# Altium PCB MTR_DVR_PCB.PcbDoc
Units mm, origin at the board's own origin, x right, y up, seen from the top; angles counter-clockwise.
Board outline 54.23 x 29.34 mm, 2 copper layers (Top Layer, Bottom Layer); 25 components, 19 nets, 71 pads, 26 vias.
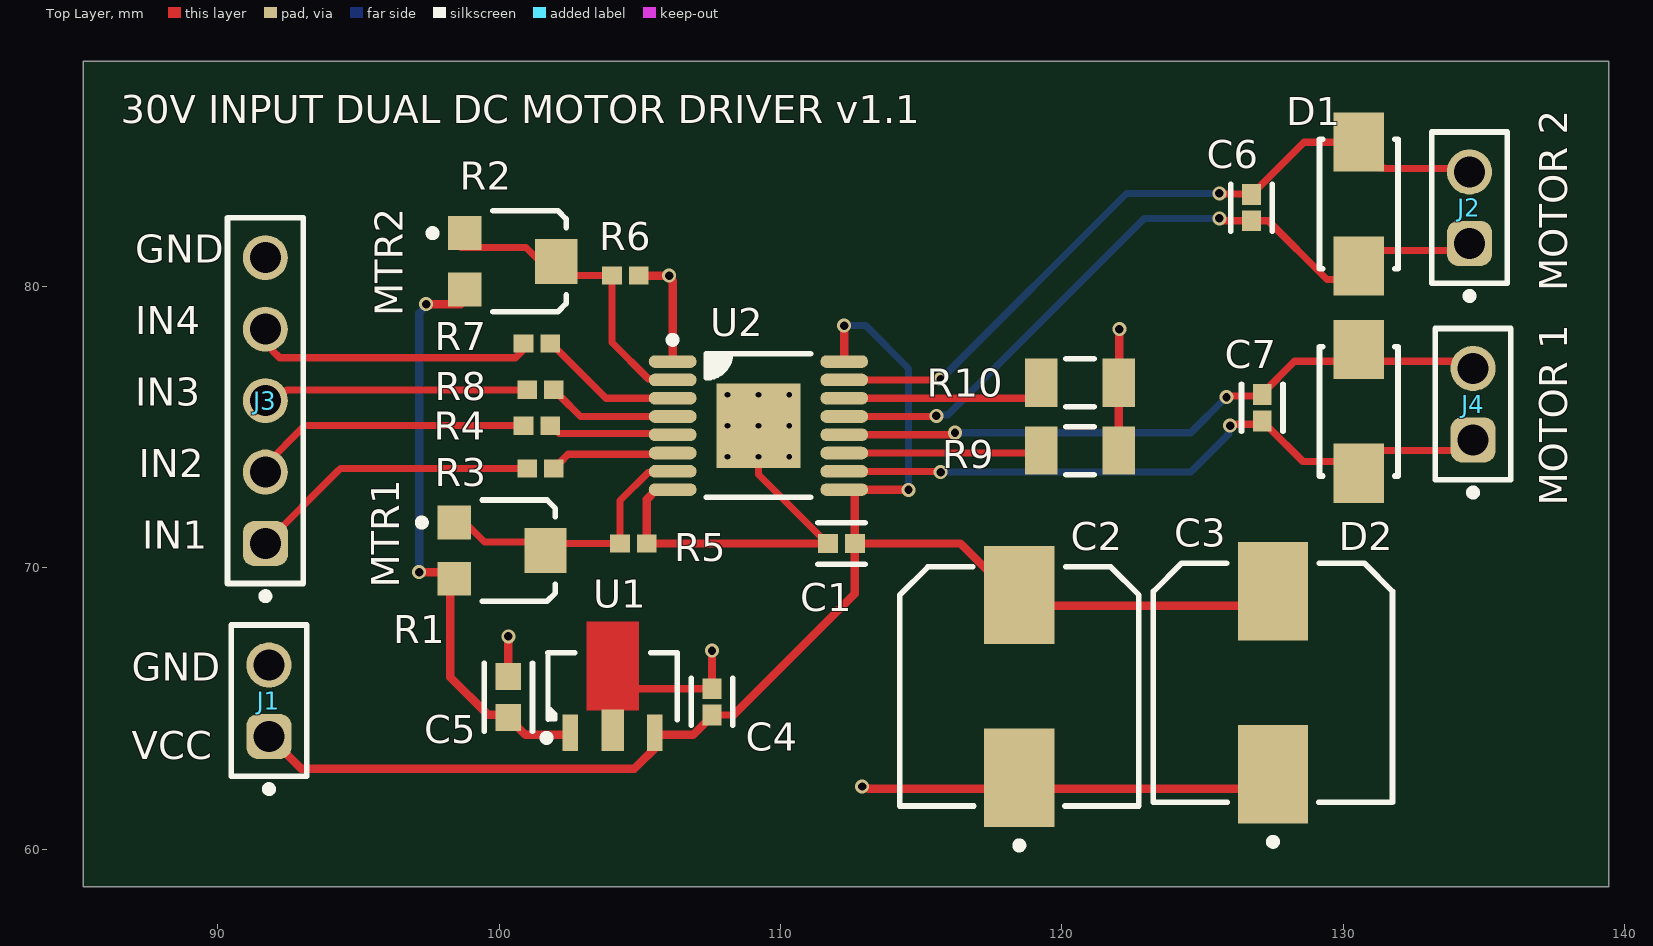
[diagram p0: Top Layer view]
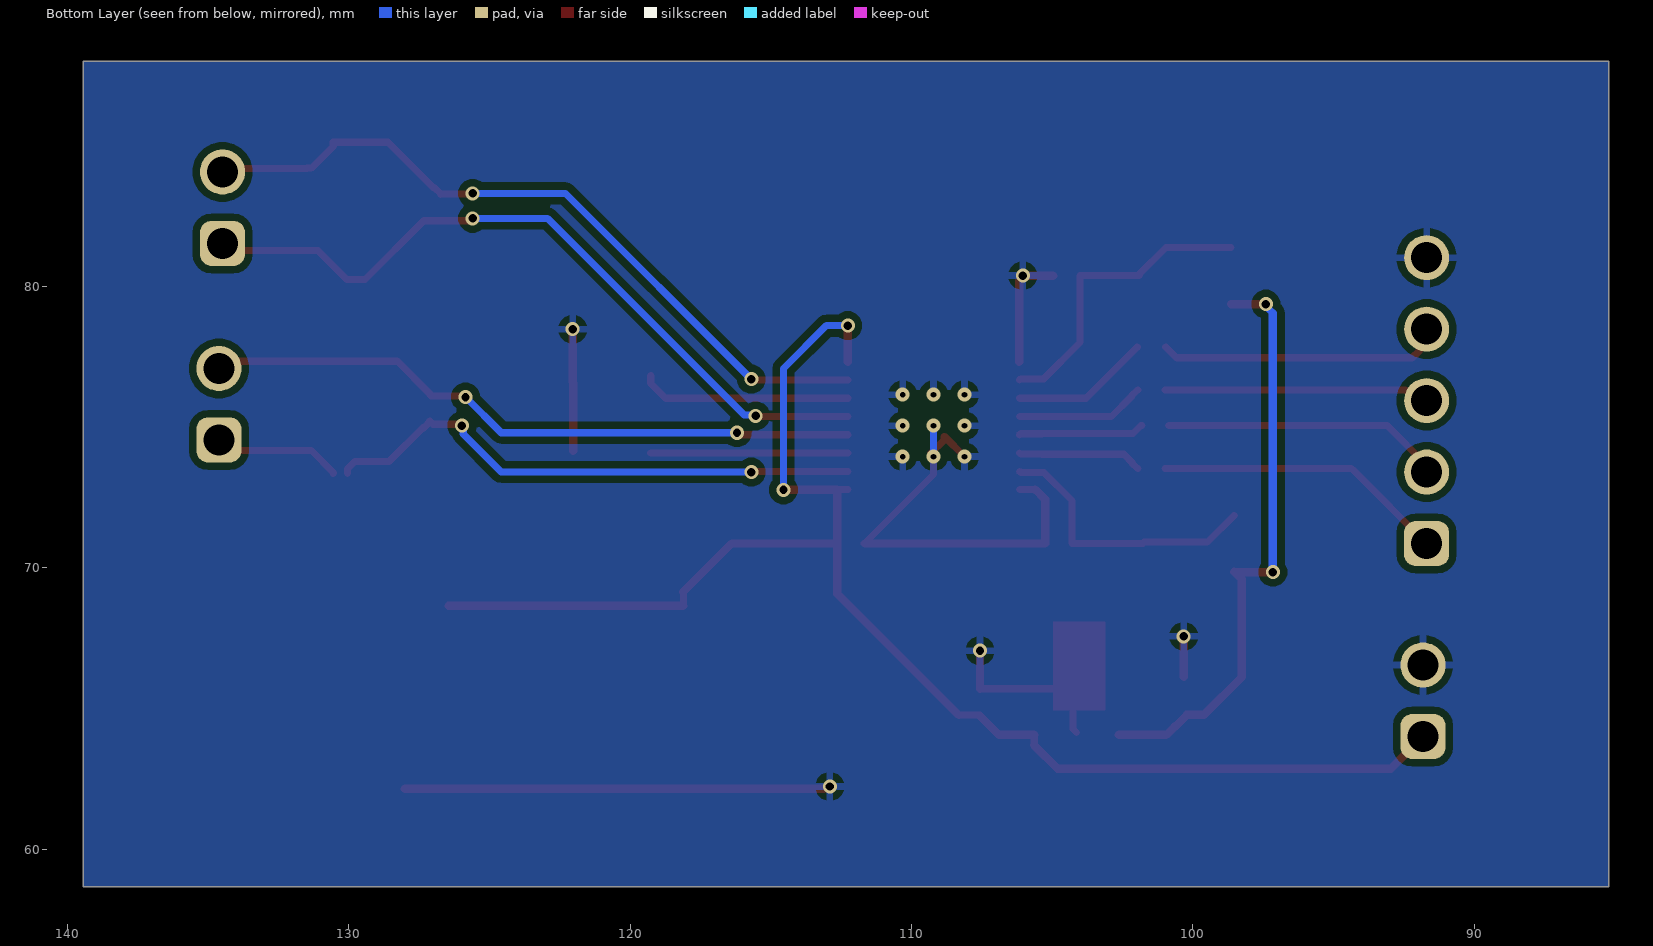
[diagram p1: Bottom Layer view, seen from below]
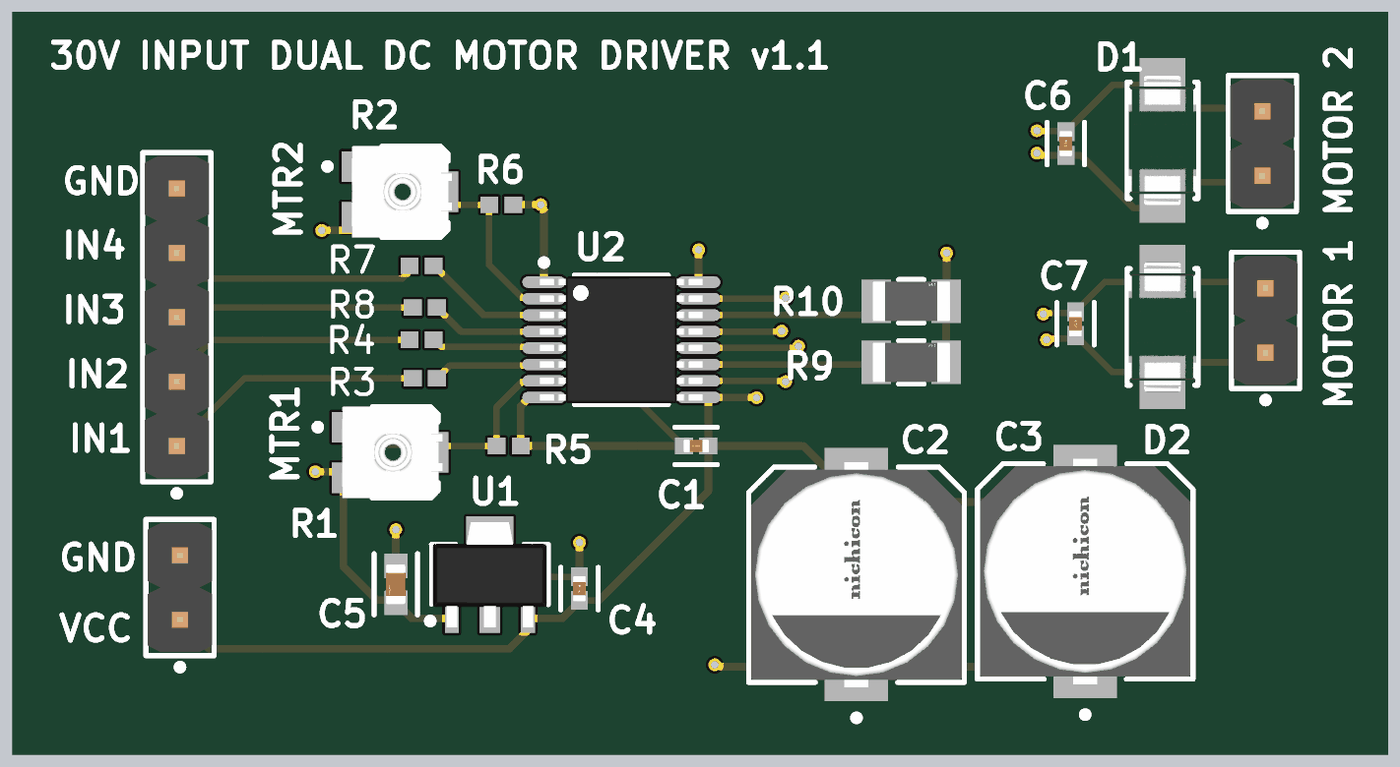
[diagram p2: 3D render of the assembled board from above, using the file's embedded part models]

## Layer stack, top to bottom
Top Solder: solder mask 0.0102, Solder Resist, Dk 3.5
Top Layer: signal copper 0.0356
Dielectric 1: dielectric 0.32, FR-4, Dk 4.8
Bottom Layer: signal copper 0.0356
Bottom Solder: solder mask 0.0102, Solder Resist, Dk 3.5

## Board outline
85.217,58.674 139.446,58.674 139.446,88.011 85.217,88.011

## Design rules (kind name [scope] priority, off if disabled: settings)
Clearance [All] p1: gap=0.1 ignorepadtopadclearanceinfootprint=TRUE
MinimumSolderMaskSliver [All] p1: minsoldermaskwidth=0.1
PolygonConnect [All] p1: connectstyle=Relief reliefconductorwidth=0.254 reliefentries=4 polygonreliefangle="90 Angle" airgapwidth=0.254
RoutingVias [All] p1: holewidth=0.711 width=1.27 viastyle="Through Hole" minholewidth=0.711 minwidth=1.27 maxholewidth=0.711 maxwidth=1.27
SilkToSilkClearance [All] p1: silktosilkclearance=0.15
SilkToSolderMaskClearance [IsPad] p1: minsilkscreentomaskgap=0.15 clearancetoexposedcopper=TRUE
SolderMaskExpansion [All] p1: expansion=0.102 istentingtop=FALSE
Width [All] p1: maxlimit=0.35 minlimit=0.254 preferedwidth=0.254
27 further rules are at their usual default settings.

## Components (designator, comment, footprint, x,y, rotation, side; value= is the part's Value field where it differs from the comment)
C1 "220nF, 50V" FP-0402-L_1_0_0_05-W_0_5-IPC_A 112.17,70.866 r0 top value=220nF
C2 "100uF, 50V" 100U_50V_ELECTROLYTIC_CAP 118.491,65.786 r90 top
C3 "100uF, 50V" 100U_50V_ELECTROLYTIC_CAP 127.508,65.913 r90 top
C4 "1uF" 1U_0402_CER_CAP_35V 107.569,65.237 r270 top
C5 "2u2" 2_2U_0402_CER_CAP 100.33,65.405 r270 top
C6 "0.1u" 1U_0402_CER_CAP_35V 126.746,82.804 r270 top
C7 "0.1u" 1U_0402_CER_CAP_35V 127.127,75.692 r270 top
D1 "SMAJ36CA" TVS_DIODE 130.556,82.931 r270 top
D2 "SMAJ36CA" TVS_DIODE 130.556,75.565 r270 top
J1 "61300211121" 2_POS_HEADER_2_54 91.821,65.278 r90 top
J2 "61300211121" 2_POS_HEADER_2_54 134.493,82.804 r90 top
J3 "61300511121" 5_POS_HEADER_2_54 91.694,75.946 r90 top
J4 "61300211121" 2_POS_HEADER_2_54 134.62,75.819 r90 top
R1 "10k" 10K_TRIM_POT 100.203,70.612 r0 top value=10kR
R2 "10k" 10K_TRIM_POT 100.584,80.899 r0 top value=10kR
R3 "33R" 33_0402_RES 101.473,73.533 r0 top
R4 "33R" 33_0402_RES 101.346,75.057 r0 top
R5 "750R" 750_0402_RES 104.775,70.866 r180 top
R6 "750R" 750_0402_RES 104.488,80.391 r180 top
R7 "33R" 33_0402_RES 101.346,77.978 r0 top
R8 "33R" 33_0402_RES 101.473,76.327 r0 top
R9 "0.25R" 0_25_RESISTOR 120.65,74.168 r0 top
R10 "0.25R" 0_25_RESISTOR 120.65,76.581 r0 top
U1 "AP7381-33SA-7" "DIODES INC SOT-89 LINEAR REG" 104.037,64.585 r90 top
U2 "A4954ELPTR-T" "ALLEGRO TSSOP-16EP LP" 109.22,75.057 r0 top

## Footprints (in the part's own frame and the unit in brackets; to place one, negate y for a bottom-side part, rotate by r counter-clockwise, add the part's x,y. Pads: shape width x height; smd on the part's side, far side on the other; paste and mask are expansions set on the pad)
0_25_RESISTOR [mil]
  rect 45.5x67.25 smd paste+0 mask+0: 1(-54.18,0) 2(54.18,0)
  silkscreen extent -20,-34 20,34, body extent -87,-43 87,43, height 10
1U_0402_CER_CAP_35V [mm]
  rect 0.739x0.672 smd paste+0 mask+0: 1(-0.467,0) 2(0.467,0)
  silkscreen extent -0.84,-0.74 0.84,0.74, body extent -1.04,-0.54 1.04,0.54, height 0.25
2_2U_0402_CER_CAP [mm]
  rect 0.959x0.912 smd paste+0 mask+0: 1(-0.727,0) 2(0.727,0)
  silkscreen extent -1.21,-0.86 1.21,0.86, body extent -1.46,-0.71 1.46,0.71, height 0.25
2_POS_HEADER_2_54 [mm] "Pin Header, pitch 2.54 mm, THT, Vertical, single row, 2p"
  rrect50% 1.6x1.6 hole 1.1: 1(-1.27,0)
  round 1.6 hole 1.1: 2(1.27,0)
  silkscreen extent -3.26,-1.35 2.69,1.35, body extent -2.54,-1.27 2.54,1.27, height 8.57
5_POS_HEADER_2_54 [mm] "Pin Header, pitch 2.54 mm, THT, Vertical, single row, 5p"
  rrect50% 1.6x1.6 hole 1.1: 1(-5.08,0)
  round 1.6 hole 1.1: 2(-2.54,0) 3(0,0) 4(2.54,0) 5(5.08,0)
  silkscreen extent -7.07,-1.35 6.5,1.35, body extent -6.35,-1.27 6.35,1.27, height 8.57
10K_TRIM_POT [mm] "SMD, 3-Leads, Body 3.8x3.6mm"
  rect 1.2x1.2 smd: 1(-1.8,1) 3(-1.8,-1)
  rect 1.5x1.6 smd: 2(1.45,0)
  silkscreen extent -3.07,-1.8 1.8,1.8, body extent -2,-1.8 1.96,1.8, height 1.15
33_0402_RES [mm] "Chip Resistor, 2-Leads, Body 1.00x0.50mm, IPC Low Density"
  rect 0.7x0.65 smd: 1(-0.475,0) 2(0.475,0)
  body extent -0.53,-0.27 0.53,0.28, height 0.4
100U_50V_ELECTROLYTIC_CAP [mm]
  rect 3.5x2.5 smd paste+0 mask+0: 1(-3.25,0) 2(3.25,0)
  silkscreen extent -5.77,-4.25 4.25,4.25, body extent -5.25,-4.5 5.25,4.5, height 0.25
750_0402_RES [mm] "Chip Resistor, 2-Leads, Body 1.00x0.50mm, IPC Low Density"
  rect 0.7x0.65 smd: 1(-0.475,0) 2(0.475,0)
  body extent -0.53,-0.27 0.53,0.28, height 0.4
"ALLEGRO TSSOP-16EP LP" [mm] "TSSOP, 16-Leads, Body 5.00x4.40mm, Pitch 0.65mm, Thermal Pad 3.00x3.00mm, IPC Medium Density"
  oval 1.7x0.45 smd: 1(-3.05,2.275) 2(-3.05,1.625) 3(-3.05,0.975) 4(-3.05,0.325) 5(-3.05,-0.325) 6(-3.05,-0.975) 7(-3.05,-1.625) 8(-3.05,-2.275) 9(3.05,-2.275) 10(3.05,-1.625) 11(3.05,-0.975) 12(3.05,-0.325) 13(3.05,0.325) 14(3.05,0.975) 15(3.05,1.625) 16(3.05,2.275)
  rect 3x3 smd: 17(0,0)
  silkscreen extent -3.17,-2.55 1.85,3.17, body extent -3.21,-2.5 3.21,2.5, height 1.2
"DIODES INC SOT-89 LINEAR REG" [mm] "SOT89, 3-Leads, Body 4.50x2.50mm, Pitch 1.50mm, Lead Span 3.3mm, IPC Medium Density"
  rect 1.3x0.55 smd: 1(-0.45,1.5) 3(-0.45,-1.5)
  rect 1.475x0.8 smd: 2(-0.362,0)
  Top Layer region: 0.35,0.925 3.5,0.925 3.5,-0.925 0.35,-0.925
  silkscreen extent -0.75,-2.3 2.4,2.47, body extent -0.87,-2.25 3.28,2.25, height 1.5
FP-0402-L_1_0_0_05-W_0_5-IPC_A [mm]
  rect 0.715x0.672 smd paste+0 mask+0: 1(-0.479,0) 2(0.479,0)
  silkscreen extent -0.84,-0.74 0.84,0.74, body extent -1.04,-0.54 1.04,0.54, height 0.25
TVS_DIODE [mm]
  rect 2.1x1.8 smd paste+0 mask+0: 1(-2.2,0) 2(2.2,0)
  silkscreen extent -2.3,-1.4 2.3,1.4, body extent -3.35,-1.5 3.35,1.5, height 0.25

## Part data
C1: library part UMK105BJ224KV-F, "CAP CER 0.22UF 50V X5R 0402", Case Code (Imperial)=0402, Case Code (Metric)=1005, Dielectric=X5R, LCSC Part No.=C268018, Manufacturer="Taiyo Yuden", Max Operating Temperature=85°C, Min Operating Temperature=-55°C, Package Quantity=1, Tolerance=10%, Voltage Rating=50V, Case/Package=0402, Category="Ceramic Capacitors", ComponentLink1Description=https://datasheet.ciiva.com/24495/460umk105bj224kv-f-24495779.pdf?src-supplier=Onlinecomponents.com, ComponentLink1URL=https://datasheet.ciiva.com/24495/460umk105bj224kv-f-24495779.pdf?src-supplier=Onlinecomponents.com, ComponentLink2Description=https://datasheet.ciiva.com/30112/713umk105bj224kv-f-30112478.pdf?src-supplier=Onlinecomponents.com, ComponentLink2URL=https://datasheet.ciiva.com/30112/713umk105bj224kv-f-30112478.pdf?src-supplier=Onlinecomponents.com, ComponentLink3Description=https://datasheet.ciiva.com/18697/mlcc-all-e-18697509.pdf?src-supplier=Digikey, ComponentLink3URL=https://datasheet.ciiva.com/18697/mlcc-all-e-18697509.pdf?src-supplier=Digikey, Halogen Free=5694HalogenFree, Height=0.5mm, Lead Free=5697LeadFree, Length=0.039inch, Manufacturer Part Number=UMK105BJ224KV-F, Material=4241ConductorMaterial, Mounting Technology="Surface Mount", Packaging="Tape and Reel", Pricing="10000=0.03115, 20000=0.03045, 40000=0.02905, 60000=0.02398, 80000=0.02338 (USD)", RoHS=Yes, RoHS Compliant=Yes, Series=M, Stock=170000, Supplier=Avnet, Supplier Part Number=UMK105BJ224KV-F, Termination=SMD/SMT, Thickness=0.022inch, Voltage Rating (DC)=50V, Width=0.02inch
C2 C3: library part UWT1H101MNL1GS, "CAP ALUM 100UF 20% 50V SMD", Dielectric Material=158ConductorMaterial, LCSC Part No.=C445063, Manufacturer=Nichicon, Supplier Part Number=7392870P, Category="Aluminum Electrolytic Capacitors", ComponentLink1Description=https://datasheet.ciiva.com/11776/0900766b80fa3a91-11776930.pdf?src-supplier=Rs, ComponentLink1URL=https://datasheet.ciiva.com/11776/0900766b80fa3a91-11776930.pdf?src-supplier=Rs, ComponentLink2Description=https://datasheet.ciiva.com/97/e-wt-97104.pdf?src-supplier=Digikey, ComponentLink2URL=https://datasheet.ciiva.com/97/e-wt-97104.pdf?src-supplier=Digikey, ComponentLink3Description=https://datasheet.ciiva.com/97/e-wt-97105.pdf?src-supplier=Digikey, ComponentLink3URL=https://datasheet.ciiva.com/97/e-wt-97105.pdf?src-supplier=Digikey, ComponentLink4Description=https://datasheet.ciiva.com/97/e-wt-97106.pdf?src-supplier=Digikey, ComponentLink4URL=https://datasheet.ciiva.com/97/e-wt-97106.pdf?src-supplier=Digikey, ComponentLink5Description=https://datasheet.ciiva.com/5362/e-wt-30307-5362773.pdf?src-supplier=Mouser, ComponentLink5URL=https://datasheet.ciiva.com/5362/e-wt-30307-5362773.pdf?src-supplier=Mouser, ComponentLink6Description=https://datasheet.ciiva.com/28458/1910938-28458459.pdf?src-supplier=Element14, ComponentLink6URL=https://datasheet.ciiva.com/28458/1910938-28458459.pdf?src-supplier=Element14, ComponentLink7Description=https://datasheet.ciiva.com/7781/e-wt-7781807.pdf?src-supplier=Element14, ComponentLink7URL=https://datasheet.ciiva.com/7781/e-wt-7781807.pdf?src-supplier=Element14, ComponentLink8Description=https://datasheet.ciiva.com/11686/e-wt-11686889.pdf?src-supplier=Avnet, ComponentLink8URL=https://datasheet.ciiva.com/11686/e-wt-11686889.pdf?src-supplier=Avnet, ComponentLink9Description=https://datasheet.ciiva.com/16502/e-wt-16502940.pdf?src-supplier=Future+Electronics, ComponentLink9URL=https://datasheet.ciiva.com/16502/e-wt-16502940.pdf?src-supplier=Future+Electronics, Lead Free=5697LeadFree, Manufacturer Part Number=UWT1H101MNL1GS, Polarity=5066Direction, Pricing="250=0.114, 1000=0.111 (GBP)", RoHS=Yes, Stock=280, Supplier=Rs
C4: library part C1005X5R1V105K050BC, "1 µF ±10% 35V Ceramic Capacitor X5R 0402 (1005 Metric)", Case Code (Imperial)=0402, Case Code (Metric)=1005, Dielectric=X5R, Dielectric Material=Ceramic, LCSC Part No.=C5331012, Manufacturer=TDK, Max Operating Temperature=85°C, Min Operating Temperature=-55°C, Supplier Part Number=445-9073-1-ND, Tolerance=10%, Voltage Rating=35V, Case/Package=0402, Category="Ceramic Capacitors", ComponentLink1Description=https://datasheet.ciiva.com/26834/getdatasheetpartid-750449-26834298.pdf?src-supplier=Verical, ComponentLink1URL=https://datasheet.ciiva.com/26834/getdatasheetpartid-750449-26834298.pdf?src-supplier=Verical, ComponentLink2Description=https://datasheet.ciiva.com/28451/1796654-28451087.pdf?src-supplier=Element14, ComponentLink2URL=https://datasheet.ciiva.com/28451/1796654-28451087.pdf?src-supplier=Element14, ComponentLink3Description=https://datasheet.ciiva.com/22719/1796654-22719533.pdf?src-supplier=Element14, ComponentLink3URL=https://datasheet.ciiva.com/22719/1796654-22719533.pdf?src-supplier=Element14, Depth=0.5mm, Lead Free="Lead Free", Length=1mm, Manufacturer Part Number=C1005X5R1V105K050BC, Material=4241ConductorMaterial, Mounting Technology="Surface Mount", Packaging="Tape and Reel", Pricing="1=0.18, 10=0.122, 50=0.0728, 100=0.0573, 500=0.04234, 1000=0.03506, 2500=0.03263, 5000=0.02985 (USD)", Radiation Hardening=No, Reach SVHC Compliant=No, RoHS=Yes, RoHS Compliant=Yes, Series=C, Stock=841637, Supplier=Digikey
C5: library part GRM188R6YA225KA12D, "CAP CER 2.2UF 35V X5R 0603", LCSC Part No.=C86017, Manufacturer=Murata, Supplier Part Number=490-7204-1-ND, Category="Ceramic Capacitors", ComponentLink1Description=https://datasheet.ciiva.com/14906/partnumbering-e-01-14906490.pdf?src-supplier=Digikey, ComponentLink1URL=https://datasheet.ciiva.com/14906/partnumbering-e-01-14906490.pdf?src-supplier=Digikey, ComponentLink2Description=https://datasheet.ciiva.com/14906/partnumbering-e-01-14906491.pdf?src-supplier=Digikey, ComponentLink2URL=https://datasheet.ciiva.com/14906/partnumbering-e-01-14906491.pdf?src-supplier=Digikey, ComponentLink3Description=https://datasheet.ciiva.com/14906/partnumbering-e-01-14906492.pdf?src-supplier=Digikey, ComponentLink3URL=https://datasheet.ciiva.com/14906/partnumbering-e-01-14906492.pdf?src-supplier=Digikey, Lead Free=5697LeadFree, Manufacturer Part Number=GRM188R6YA225KA12D, Pricing="1=0.19, 10=0.131, 50=0.0786, 100=0.0618, 500=0.04562, 1000=0.03776 (USD)", RoHS=Yes, Stock=373912, Supplier=Digikey
C6 C7: library part GMK105BJ104KV-F, "CAP CER 0.1UF 35V X5R 0402", LCSC Part No.=C187828, Manufacturer="Taiyo Yuden", Supplier Part Number=587-1994-6-ND, Category="Ceramic Capacitors", ComponentLink1Description=https://datasheet.ciiva.com/30194/200gmk105bj104kv-f-30194761.pdf?src-supplier=Onlinecomponents.com, ComponentLink1URL=https://datasheet.ciiva.com/30194/200gmk105bj104kv-f-30194761.pdf?src-supplier=Onlinecomponents.com, ComponentLink2Description=https://datasheet.ciiva.com/11464/gmk105bj104kv-f-ss-11464131.pdf?src-supplier=Avnet, ComponentLink2URL=https://datasheet.ciiva.com/11464/gmk105bj104kv-f-ss-11464131.pdf?src-supplier=Avnet, ComponentLink3Description=https://datasheet.ciiva.com/30104/147gmk105bj104kv-f-30104963.pdf?src-supplier=Onlinecomponents.com, ComponentLink3URL=https://datasheet.ciiva.com/30104/147gmk105bj104kv-f-30104963.pdf?src-supplier=Onlinecomponents.com, ComponentLink4Description=https://datasheet.ciiva.com/15920/1013gmk105bj104kv-f-15920676.pdf?src-supplier=Onlinecomponents.com, ComponentLink4URL=https://datasheet.ciiva.com/15920/1013gmk105bj104kv-f-15920676.pdf?src-supplier=Onlinecomponents.com, ComponentLink5Description=https://datasheet.ciiva.com/5412/mlcc-all-e-541559-5412764.pdf?src-supplier=Mouser, ComponentLink5URL=https://datasheet.ciiva.com/5412/mlcc-all-e-541559-5412764.pdf?src-supplier=Mouser, ComponentLink6Description=https://datasheet.ciiva.com/7657/1497285-7657325.pdf?src-supplier=Element14, ComponentLink6URL=https://datasheet.ciiva.com/7657/1497285-7657325.pdf?src-supplier=Element14, ComponentLink7Description=https://datasheet.ciiva.com/22694/1497285-22694245.pdf?src-supplier=Element14, ComponentLink7URL=https://datasheet.ciiva.com/22694/1497285-22694245.pdf?src-supplier=Element14, Halogen Free=5694HalogenFree, Manufacturer Part Number=GMK105BJ104KV-F, Material=4241ConductorMaterial, Pricing="1=0.13, 10=0.089, 50=0.053, 100=0.0417, 500=0.0308, 1000=0.0255, 2500=0.02374, 5000=0.02172 (USD)", RoHS=Yes, Stock=1172174, Supplier=Digikey
D1 D2: "TVS DIODE 36VWM 58.1VC DO214AC", Breakdown Voltage=40V, Case/Package=DO-214AC, Clamping Voltage=58.1V, LCSC Part No.=C908830, Leakage Current=1uA, Manufacturer=Littelfuse, Max Breakdown Voltage=44.2V, Max Operating Temperature=150°C, Max Power Dissipation=3.3W, Max Surge Current=6.9A, Min Operating Temperature=-65°C, Operating Supply Voltage=36V, Package Quantity=5000, Peak Pulse Power=400W, Power Line Protection=No, Supplier Part Number=SMAJ36CALFCT-ND, Test Current=1mA, Category="TVS Diodes", Clamping Voltage-Max=58.1V, ComponentLink1Description=https://datasheet.ciiva.com/16487/littelfuse-tvs-diode-smaj-16487439.pdf?src-supplier=Future+Electronics, ComponentLink1URL=https://datasheet.ciiva.com/16487/littelfuse-tvs-diode-smaj-16487439.pdf?src-supplier=Future+Electronics, ComponentLink2Description=https://datasheet.ciiva.com/331/littelfuse-tvs-diode-smaj-datasheet-pdf-331061.pdf?src-supplier=Digikey, ComponentLink2URL=https://datasheet.ciiva.com/331/littelfuse-tvs-diode-smaj-datasheet-pdf-331061.pdf?src-supplier=Digikey, ComponentLink3Description=https://datasheet.ciiva.com/331/littelfuse-tvs-diode-smaj-datasheet-pdf-331062.pdf?src-supplier=Digikey, ComponentLink3URL=https://datasheet.ciiva.com/331/littelfuse-tvs-diode-smaj-datasheet-pdf-331062.pdf?src-supplier=Digikey, ComponentLink4Description=https://datasheet.ciiva.com/331/littelfuse-tvs-diode-smaj-datasheet-pdf-331060.pdf?src-supplier=Digikey, ComponentLink4URL=https://datasheet.ciiva.com/331/littelfuse-tvs-diode-smaj-datasheet-pdf-331060.pdf?src-supplier=Digikey, Diode Type=ZENER, Direction=Bidirectional, Height=2.29mm, Lead Free="Lead Free", Length=5.28mm, Manufacturer Part Number=SMAJ36CA, Max Reverse Leakage Current=1uA, Min Breakdown Voltage=40V, Mounting Technology="Surface Mount", Number of Bidirectional Channels=1, Number of Channels=1, Number of Elements=1, Packaging="Tape and Reel", Peak Pulse Current=6.9A, Pins=2, Polarity=Bidirectional, Power Dissipation=400W, Pricing="1=0.4, 10=0.287, 100=0.1449, 500=0.12844, 1000=0.09996, 2000=0.08947 (USD)", Reach SVHC Compliant=No, Reverse Breakdown Voltage=40V, Reverse Standoff Voltage=36V, Reverse Voltage=36V, RoHS=Yes, RoHS Compliant=Yes, Series=SMAJ, Stock=54488, Supplier=Digikey, Termination=SMD/SMT, Voltage Rating (DC)=36V, Width=2.79mm
J1 J2 J4: "CONN HEADER VERT 2POS 2.54MM", Color=Black, Contact Resistance=20mR, Current Rating=3A, LCSC Part No.=N/A, Manufacturer="Wurth Electronics", Max Operating Temperature=125°C, Min Operating Temperature=-40°C, Operating Supply Voltage=250V, Supplier Part Number=8281581, Category="Headers and Wire Housings", ComponentLink1Description=https://datasheet.ciiva.com/13619/6130xx11121-48870-13619345.pdf?src-supplier=Mouser, ComponentLink1URL=https://datasheet.ciiva.com/13619/6130xx11121-48870-13619345.pdf?src-supplier=Mouser, Contact Gender=Male, Contact Material="Copper Alloy,Copper", Contact Mating Length=0.236inch, Contact Plating=Gold, Contact Type="Male Pin", Gender=29Gender, Height=8.94mm, Housing Material=PBT, Lead Free=5697LeadFree, Manufacturer Part Number=61300211121, Mounting Technology="Through Hole", Number of Contacts=2, Number of Positions=2, Number of Rows=1, Orientation=5495OrientationType, Packaging=Bulk, Pitch=0.1inch, Pricing="5=0.11, 50=0.076, 100=0.062, 200=0.058, 500=0.052 (GBP)", Reach SVHC Compliant=Unknown, RoHS=Yes, RoHS Compliant=Yes, Series=WR-PHD, Stock=865, Supplier=Rs, Termination="Through Hole", Voltage Rating=250V
J3: "CONN HEADER VERT 5POS 2.54MM", Color=Black, Contact Resistance=20mR, Current Rating=3A, LCSC Part No.=N/A, Manufacturer="Wurth Electronics", Max Operating Temperature=105°C, Min Operating Temperature=-40°C, Operating Supply Voltage=250V, Supplier Part Number=8281597, Category="Headers and Wire Housings", ComponentLink1Description=http://www.farnell.com/cad/1737268.pdf?src-supplier=Element14, ComponentLink1URL=http://www.farnell.com/cad/1737268.pdf?src-supplier=Element14, ComponentLink2Description=https://datasheet.octopart.com/61300511121-W%C3%BCrth-Elektronik-datasheet-21154836.pdf?src-supplier=Element14, ComponentLink2URL=https://datasheet.octopart.com/61300511121-W%C3%BCrth-Elektronik-datasheet-21154836.pdf?src-supplier=Element14, ComponentLink3Description=https://katalog.we-online.de/em/datasheet/6130xx11121.pdf?src-supplier=Digikey, ComponentLink3URL=https://katalog.we-online.de/em/datasheet/6130xx11121.pdf?src-supplier=Digikey, Contact Material=Copper, Contact Mating Length=0.236inch, Contact Plating=Gold, Contact Type="Male Pin", Gender=Male, Height=8.89mm, Lead Free="Lead Free", Manufacturer Part Number=61300511121, Mounting Technology="Through Hole", Number of Contacts=5, Number of Positions=5, Number of Rows=1, Orientation=5495OrientationType, Packaging=Bulk, Pitch=0.1inch, Pricing="5=0.218, 125=0.118, 500=0.1, 2500=0.094, 5000=0.088 (GBP)", Reach SVHC Compliant=Unknown, RoHS=Yes, RoHS Compliant=Yes, Series=WR-PHD, Stock=415, Supplier=Rs, Termination=Solder, Voltage Rating=250V
R1 R2: library part TC33X-2-103E, "TRIMMER 10K OHM 0.15W J LEAD TOP", Color=Silver, LCSC Part No.=C719176, Manufacturer=Bourns, Max Operating Temperature=100°C, Max Power Dissipation=100mW, Min Operating Temperature=-40°C, Package Quantity=1, Resistance Tolerance=25%, Resistor Type=Cermet, Supplier Part Number=4617135P, Temperature Coefficient=250ppm/°C, Voltage Rating (DC)=50V, Category="Variable Resistors and Potentiometers", ComponentLink1Description=https://datasheet.ciiva.com/11830/0900766b802749b3-11830705.pdf?src-supplier=Rs, ComponentLink1URL=https://datasheet.ciiva.com/11830/0900766b802749b3-11830705.pdf?src-supplier=Rs, ComponentLink2Description=https://datasheet.ciiva.com/7953/1818686-7953349.pdf?src-supplier=Element14, ComponentLink2URL=https://datasheet.ciiva.com/7953/1818686-7953349.pdf?src-supplier=Element14, ComponentLink3Description=https://datasheet.ciiva.com/28659/1520225-28659212.pdf?src-supplier=Element14, ComponentLink3URL=https://datasheet.ciiva.com/28659/1520225-28659212.pdf?src-supplier=Element14, ComponentLink4Description=https://datasheet.ciiva.com/2155/tc33-2155963.pdf?src-supplier=Digikey, ComponentLink4URL=https://datasheet.ciiva.com/2155/tc33-2155963.pdf?src-supplier=Digikey, ComponentLink5Description=https://datasheet.ciiva.com/2155/tc33-2155964.pdf?src-supplier=Digikey, ComponentLink5URL=https://datasheet.ciiva.com/2155/tc33-2155964.pdf?src-supplier=Digikey, ComponentLink6Description=https://datasheet.ciiva.com/2155/tc33-2155962.pdf?src-supplier=Digikey, ComponentLink6URL=https://datasheet.ciiva.com/2155/tc33-2155962.pdf?src-supplier=Digikey, ComponentLink7Description=https://datasheet.ciiva.com/8089/tc33-8089484.pdf?src-supplier=Avnet, ComponentLink7URL=https://datasheet.ciiva.com/8089/tc33-8089484.pdf?src-supplier=Avnet, ComponentLink8Description=https://datasheet.ciiva.com/26944/getdatasheetpartid-183773-26944166.pdf?src-supplier=Verical, ComponentLink8URL=https://datasheet.ciiva.com/26944/getdatasheetpartid-183773-26944166.pdf?src-supplier=Verical, Depth=3.8mm, Height=0.047inch, Lead Free="Lead Free", Length=3mm, Manufacturer Part Number=TC33X-2-103E, Military Standard=Not, Mounting Technology="Surface Mount", Number of Turns=1, Packaging="Tape and Reel", Power Rating=100mW, Pricing="500=0.175, 1000=0.158, 2000=0.141, 4000=0.124 (GBP)", Radiation Hardening=No, Reach SVHC Compliant=No, RoHS=Yes, RoHS Compliant=Yes, Series=TC33, Stock=53000, Supplier=Rs, Taper=Linear, Termination="Foot Print", Tolerance=25%, Weight=29.4mg, Width=0.118inch
R3 R4 R7 R8: library part RC0402FR-0733RL, "RES 33 OHM 1% 1/16W 0402", Case Code (Imperial)=0402, Case Code (Metric)=1005, LCSC Part No.=C138002, Manufacturer=Yageo, Max Operating Temperature=155°C, Max Power Dissipation=63mW, Min Operating Temperature=-55°C, Package Quantity=10000, Power Rating=62.5mW, Resistance Tolerance=1%, Resistor Type="Thick Film", Supplier Part Number=311-33.0LRCT-ND, Temperature Coefficient=100ppm/°C, Voltage Rating=50V, Case/Package=0402, Category="Chip SMD Resistors", ComponentLink1Description=https://datasheet.ciiva.com/11819/0900766b80c66297-11819487.pdf?src-supplier=Rs, ComponentLink1URL=https://datasheet.ciiva.com/11819/0900766b80c66297-11819487.pdf?src-supplier=Rs, ComponentLink2Description=https://datasheet.ciiva.com/24070/pyu-rc0402-51-rohs-l-6-r-8721-24070077.pdf?src-supplier=Mouser, ComponentLink2URL=https://datasheet.ciiva.com/24070/pyu-rc0402-51-rohs-l-6-r-8721-24070077.pdf?src-supplier=Mouser, ComponentLink3Description=https://datasheet.ciiva.com/7849/1018594-7849967.pdf?src-supplier=Element14, ComponentLink3URL=https://datasheet.ciiva.com/7849/1018594-7849967.pdf?src-supplier=Element14, ComponentLink4Description=https://datasheet.ciiva.com/7849/1018594-7849966.pdf?src-supplier=Element14, ComponentLink4URL=https://datasheet.ciiva.com/7849/1018594-7849966.pdf?src-supplier=Element14, ComponentLink5Description=https://datasheet.ciiva.com/15189/getdatasheetpartid-329253-15189431.pdf?src-supplier=Verical, ComponentLink5URL=https://datasheet.ciiva.com/15189/getdatasheetpartid-329253-15189431.pdf?src-supplier=Verical, ComponentLink6Description=https://datasheet.ciiva.com/17070/pyu-rc0402-51-rohs-l-6-r-17070335.pdf?src-supplier=Future+Electronics, ComponentLink6URL=https://datasheet.ciiva.com/17070/pyu-rc0402-51-rohs-l-6-r-17070335.pdf?src-supplier=Future+Electronics, Construction=Rectangular, Depth=0.5mm, Features="Moisture Resistant", Height=0.35mm, Lead Free="Lead Free", Length=1mm, Manufacturer Part Number=RC0402FR-0733RL, Military Standard=Not, Number of Terminations=2, Packaging="Tape and Reel", Pins=2, Pricing="1=0.1, 10=0.015, 50=0.0088, 100=0.0073, 500=0.00488, 1000=0.00417, 5000=0.00297 (USD)", Reach SVHC Compliant=Unknown, RoHS=Yes, RoHS Compliant=Yes, Series=RC, Stock=10660929, Supplier=Digikey, Technology="THICK FILM", Termination=SMD/SMT, Tolerance=1%, Voltage Rating (AC)=50V, Voltage Rating (DC)=50V, Width=0.5mm
R5 R6: library part RC0402JR-07750RL, "RES 750 OHM 5% 1/16W 0402", LCSC Part No.=C137842, Manufacturer=Yageo, Supplier Part Number=7253206, Category="Chip SMD Resistors", ComponentLink1Description=https://datasheet.ciiva.com/12575/pyu-rc0402-51-rohs-l-6-r-8721-12575790.pdf?src-supplier=Mouser, ComponentLink1URL=https://datasheet.ciiva.com/12575/pyu-rc0402-51-rohs-l-6-r-8721-12575790.pdf?src-supplier=Mouser, ComponentLink2Description=https://datasheet.ciiva.com/8884/pyu-rc0402-51-rohs-l-6-8884858.pdf?src-supplier=Avnet, ComponentLink2URL=https://datasheet.ciiva.com/8884/pyu-rc0402-51-rohs-l-6-8884858.pdf?src-supplier=Avnet, ComponentLink3Description=https://datasheet.ciiva.com/16744/pyu-rc0402-51-rohs-l-6-r-16744186.pdf?src-supplier=Future+Electronics, ComponentLink3URL=https://datasheet.ciiva.com/16744/pyu-rc0402-51-rohs-l-6-r-16744186.pdf?src-supplier=Future+Electronics, Manufacturer Part Number=RC0402JR-07750RL, Pricing="10000=0.0008, 100000=0.0007, 300000=0.0007, 750000=0.0007, 2000000=0.0006 (USD)", RoHS=Yes, Stock=20000, Supplier="Future Electronics"
R9 R10: library part CSR1206FKR250, "RES 0.25 OHM 1% 1/2W 1206", LCSC Part No.=C346771, Manufacturer="Stackpole Electronics", Supplier Part Number=CSR1206FKR250CT-ND, Category="Chip SMD Resistors", ComponentLink1Description=https://www.seielect.com/catalog/SEI-Packaging.pdf?src-supplier=Digikey, ComponentLink1URL=https://www.seielect.com/catalog/SEI-Packaging.pdf?src-supplier=Digikey, ComponentLink2Description=https://datasheet.octopart.com/CSR1206FKR250-Stackpole-Electronics-datasheet-141193797.pdf?src-supplier=LKR, ComponentLink2URL=https://datasheet.octopart.com/CSR1206FKR250-Stackpole-Electronics-datasheet-141193797.pdf?src-supplier=LKR, Lead Free=5697LeadFree, Manufacturer Part Number=CSR1206FKR250, Pricing="1=0.41, 10=0.298, 25=0.2388, 50=0.1772, 100=0.125, 250=0.11136, 500=0.09544 (USD)", RoHS=Yes, Stock=83913, Supplier=Digikey
U1: "IC MOTOR DRIVER 8V-40V 16TSSOP", LCSC Part No.=C3752764, Manufacturer=Diodes, Output Voltage=3.3V, Supplier Part Number=31-AP7381-33SA-7CT-ND, ComponentLink1Description=https://datasheet.octopart.com/AP7381-33SA-7-Diodes-Inc.-datasheet-166296600.pdf?src-supplier=Future+Electronics, ComponentLink1URL=https://datasheet.octopart.com/AP7381-33SA-7-Diodes-Inc.-datasheet-166296600.pdf?src-supplier=Future+Electronics, ComponentLink2Description=https://datasheet.octopart.com/AP7381-33SA-7-Diodes-Inc.-datasheet-141402627.pdf?src-supplier=Farnell, ComponentLink2URL=https://datasheet.octopart.com/AP7381-33SA-7-Diodes-Inc.-datasheet-141402627.pdf?src-supplier=Farnell, Manufacturer Part Number=AP7381-33SA-7, Number of Channels=1NUMBER, Pricing="1=0.62, 10=0.37, 25=0.3044, 100=0.23, 250=0.19328, 500=0.17066, 1000=0.15167 (USD)", RoHS=Yes, Stock=40, Supplier=Digikey
U2: "IC MOTOR DRIVER 8V-40V 16TSSOP", LCSC Part No.=C2688265, Manufacturer="Allegro MicroSystems", Supplier Part Number=620-1384-1-ND, Category="Motor Drivers", ComponentLink1Description=https://datasheet.ciiva.com/8199/a4954-datasheet-8199653.pdf?src-supplier=Avnet, ComponentLink1URL=https://datasheet.ciiva.com/8199/a4954-datasheet-8199653.pdf?src-supplier=Avnet, Manufacturer Part Number=A4954ELPTR-T, Pricing="1=2.78, 10=2.5, 25=2.3632, 100=2.0483, 250=1.94324, 500=1.74366, 1000=1.47056 (USD)", RoHS=Yes, Stock=21903, Supplier=Digikey

## Via types
v1: diameter 0.5, hole 0.3, Top Layer to Bottom Layer, 17 vias
v2: diameter 0.5, hole 0.2, Top Layer to Bottom Layer, 9 vias

## Nets (pads, with @x,y where several pads share a name; then routed paths per layer and width w, separated by ;. In a path a pad name is that pad's centre, name@x,y a point inside that pad or via, vN(x,y) a via of type N, cw(c..) or ccw(c..) an arc to the next point about the centre after c; other vN are vias at no path point)
3V3: C5.2 R1.3 R2.3 U1.1 | length 21.4
  Top Layer w0.254: R1.3@98.514,69.85 R1.3@98.53,69.866 ; R2.3@98.641,79.375 R2.3@98.657,79.391
  Top Layer w0.3: v1(97.155,69.85) R1.3@98.514,69.85 ; v1(97.409,79.375) R2.3@98.641,79.375 ; R1.3@98.53,69.866 98.262,69.598 98.262,66.117 99.6,64.779 100.229,64.779 100.229,64.756 100.636,64.349 100.659,64.349 100.942,64.066 U1.1@102.64,64.066
  Bottom Layer w0.254: 97.155,79.054 97.409,79.308 v1(97.409,79.375)
  Bottom Layer w0.3: v1@97.155,69.857 97.155,79.054
GND: C1.1 C2.1 C3.1 C4.1 C5.1 J1.2 J3.5 R5.1 R6.1 R9.2 R10.2 U1.2 U2.1 U2.8 U2.17 | length 47.3
  Top Layer w0.254: U1.2@104.14,64.154 104.261,64.274 104.261,65.167 104.797,65.703 C4.1 ; U2.8@105.598,72.782 U2.8 ; v1(106.045,80.391) 106.045,80.324 v1@106.17,80.199 ; v2(108.12,73.957) 108.839,74.676 108.839,74.546 109.324,74.061 U2.17@109.212,73.949 ; v2(109.22,73.957) 109.22,73.316 111.67,70.866 C1.1 ; R10.2 R10.2@122.047,76.602
  Top Layer w0.3: C5.1 v1(100.33,67.564) ; R6.1 v1(106.045,80.391) ; U2.8@105.598,72.782 105.25,72.434 R5.1 C1.1@111.67,70.866 ; U2.1 v1@106.17,80.199 ; C4.1 v1(107.569,67.056) ; v1(112.903,62.23) 112.941,62.192 113.083,62.192 113.119,62.155 C3.1@128.016,62.155 ; R9.2 R10.2 ; R10.2@122.047,76.602 v1(122.047,78.486)
  Bottom Layer w0.254: v2(109.22,73.957) v2(109.22,75.057)
  other v2: 110.32,73.957 108.12,75.057 110.32,75.057 108.12,76.157 109.22,76.157 110.32,76.157
IN1: R3.2 U2.6 | length 4.5
  Top Layer w0.254: R3.2 101.973,73.533 102.171,73.731 102.171,73.756 102.453,74.038 105.362,74.038 105.369,74.044 106.132,74.044 U2.6
IN2: R4.2 U2.5 | length 4.5
  Top Layer w0.254: R4.2 101.846,75.057 102.127,74.776 105.362,74.776 105.369,74.77 106.132,74.77 U2.5
IN3: R7.2 U2.3 | length 5
  Top Layer w0.254: R7.2@101.979,77.853 101.979,77.845 102.044,77.78 102.052,77.78 103.8,76.032 U2.3
IN4: R8.2 U2.4 | length 4.6
  Top Layer w0.254: R8.2 101.973,76.327 102.171,76.129 102.171,76.104 102.893,75.382 U2.4
LOGIC_IN1: J3.1 R3.1 | length 10.4
  Top Layer w0.254: J3.1 94.268,73.44 94.361,73.533 R3.1
LOGIC_IN2: J3.2 R4.1 | length 10
  Top Layer w0.254: J3.2 91.694,73.66 93.091,75.057 R4.1
LOGIC_IN3: J3.4 R7.1 | length 10.1
  Top Layer w0.254: J3.4 91.952,78.228 91.952,77.72 92.202,77.47 100.584,77.47 R7.1@100.965,77.851
LOGIC_IN4: J3.3 R8.1 | length 9.5
  Top Layer w0.254: J3.3 92.058,75.946 92.439,76.327 R8.1
MOT_OUT_1A: C7.2 D2.2 J4.1 U2.10 | length 24
  Top Layer w0.254: U2.10 115.671,73.432 v1(115.697,73.406) ; v1(125.984,75.057) 126.031,75.104 127.006,75.104 C7.2 127.127,75.192 127.336,74.983 127.37,74.983 128.565,73.787 129.783,73.787 130.048,73.522 D2.2@130.048,73.365 ; D2.2 130.556,73.395 131.329,74.168 J4.1@134.62,74.168
  Bottom Layer w0.254: v1(115.697,73.406) 124.587,73.406 125.937,74.756 125.937,75.01 v1(125.984,75.057)
MOT_OUT_1B: C7.1 D2.1 J4.2 U2.12 | length 23.4
  Top Layer w0.254: U2.12 v1@116.205,74.732 ; v1(125.857,76.073) 125.9,76.116 127.084,76.116 C7.1 127.127,76.192 128.278,77.343 J4.2@134.62,77.343
  Bottom Layer w0.254: v1(116.205,74.803) 124.587,74.803 v1(125.857,76.073)
MOT_OUT_2A: C6.2 D1.2 J2.1 U2.13 | length 26.6
  Top Layer w0.254: U2.13 115.523,75.382 v1(115.542,75.401) ; v1(125.603,82.423) 125.67,82.423 125.755,82.337 127.34,82.337 129.424,80.253 130.078,80.253 131.105,81.28 134.112,81.28 J2.1@134.493,81.661
  Bottom Layer w0.254: v1(115.542,75.401) 115.575,75.434 115.947,75.434 122.936,82.423 v1(125.603,82.423)
MOT_OUT_2B: C6.1 D1.1 J2.2 U2.15 | length 26.2
  Top Layer w0.254: U2.15 115.671,76.682 v1(115.697,76.708) ; v1(125.603,83.312) 125.624,83.291 126.725,83.291 C6.1 126.746,83.304 126.955,83.513 126.989,83.513 128.43,84.955 128.606,85.131 D1.1 130.556,84.981 131.329,84.208 131.479,84.208 131.486,84.201 J2.2@134.493,84.201
  Bottom Layer w0.254: v1(115.697,76.708) 122.301,83.312 v1(125.603,83.312)
PWR_RTN12: R9.1 U2.11 | length 7
  Top Layer w0.254: U2.11 R9.1@119.274,74.082
PWR_RTN34: R10.1 U2.14 | length 7.5
  Top Layer w0.254: U2.14 118.747,76.032 119.274,76.559 R10.1@119.274,76.835
VCC: C1.2 C2.2 C3.2 C4.2 J1.1 U1.3 U2.9 U2.16 | length 53.5
  Top Layer w0.254: U1.3@105.64,63.691 U1.3@105.64,64.066 ; C4.2@107.569,64.737 C4.2 108.331,64.77 ; U2.16@112.268,77.334 U2.16 ; U2.9 112.558,72.782 U2.9@112.649,72.691 ; v1@114.543,72.782 v1(114.554,72.771) ; C2.2@118.11,68.655 C2.2@118.11,69.155
  Top Layer w0.3: J1.1 92.964,62.865 104.814,62.865 U1.3@105.64,63.691 ; U1.3@105.64,64.066 106.898,64.066 C4.2@107.569,64.737 ; 108.331,64.77 112.649,69.088 C1.2 ; U2.16@112.268,77.334 v1(112.268,78.613) ; U2.9@112.649,72.691 C1.2 ; U2.9@112.649,72.782 v1@114.543,72.782 ; 116.332,70.866 C1.2 ; 116.399,70.866 C2.2@118.11,69.155 ; C2.2@118.11,68.655 C3.2@126.461,68.655
  Bottom Layer w0.254: v1(112.268,78.613) 113.03,78.613 114.554,77.089 v1(114.554,72.771)
VREF12: R1.1 R1.2 R5.2 U2.7 | length 10
  Top Layer w0.254: R1.1@98.53,71.866 99.48,70.916 101.73,70.916 101.78,70.866 R5.2 104.3,72.394 105.3,73.394 106.132,73.394 U2.7
VREF34: R2.1 R2.2 R6.2 U2.2 | length 10.9
  Top Layer w0.254: R2.1@98.657,81.391 100.957,81.391 101.907,80.441 101.907,80.391 R6.2 104.013,78.007 105.3,76.72 106.132,76.72 U2.2

## Polygon pours and split planes (outlines as drawn)
GND on Bottom Layer "GND_L02_P000" (solid, pour order 0): 85.217,88.011 139.446,88.011 139.446,58.674 85.217,58.674

## Silkscreen, mask and mechanical layers (free items; w line width, h text height)
Top Overlay:
  text "30V INPUT DUAL DC MOTOR DRIVER v1.1" at 86.56,85.798 h1
  text "GND" at 87.068,80.845 h1
  text "MOTOR 2" at 137.976,79.829 h1 r90
  text "MTR2" at 96.574,78.94 h1 r90
  text "IN4" at 87.068,78.305 h1
  text "IN3" at 87.068,75.765 h1
  text "IN2" at 87.195,73.225 h1
  text "MOTOR 1" at 137.976,72.209 h1 r90
  text "IN1" at 87.322,70.685 h1
  text "MTR1" at 96.447,69.288 h1 r90
  text "GND" at 86.941,65.986 h1
  text "VCC" at 86.941,63.192 h1